# Altium PCB DIS_v2.1.PcbDoc
Units mm, origin at the board's own origin, x right, y up, seen from the top; angles counter-clockwise.
Board outline 51 x 45 mm, 2 copper layers (Top Layer, Bottom Layer); 40 components, 42 nets, 153 pads, 25 vias.
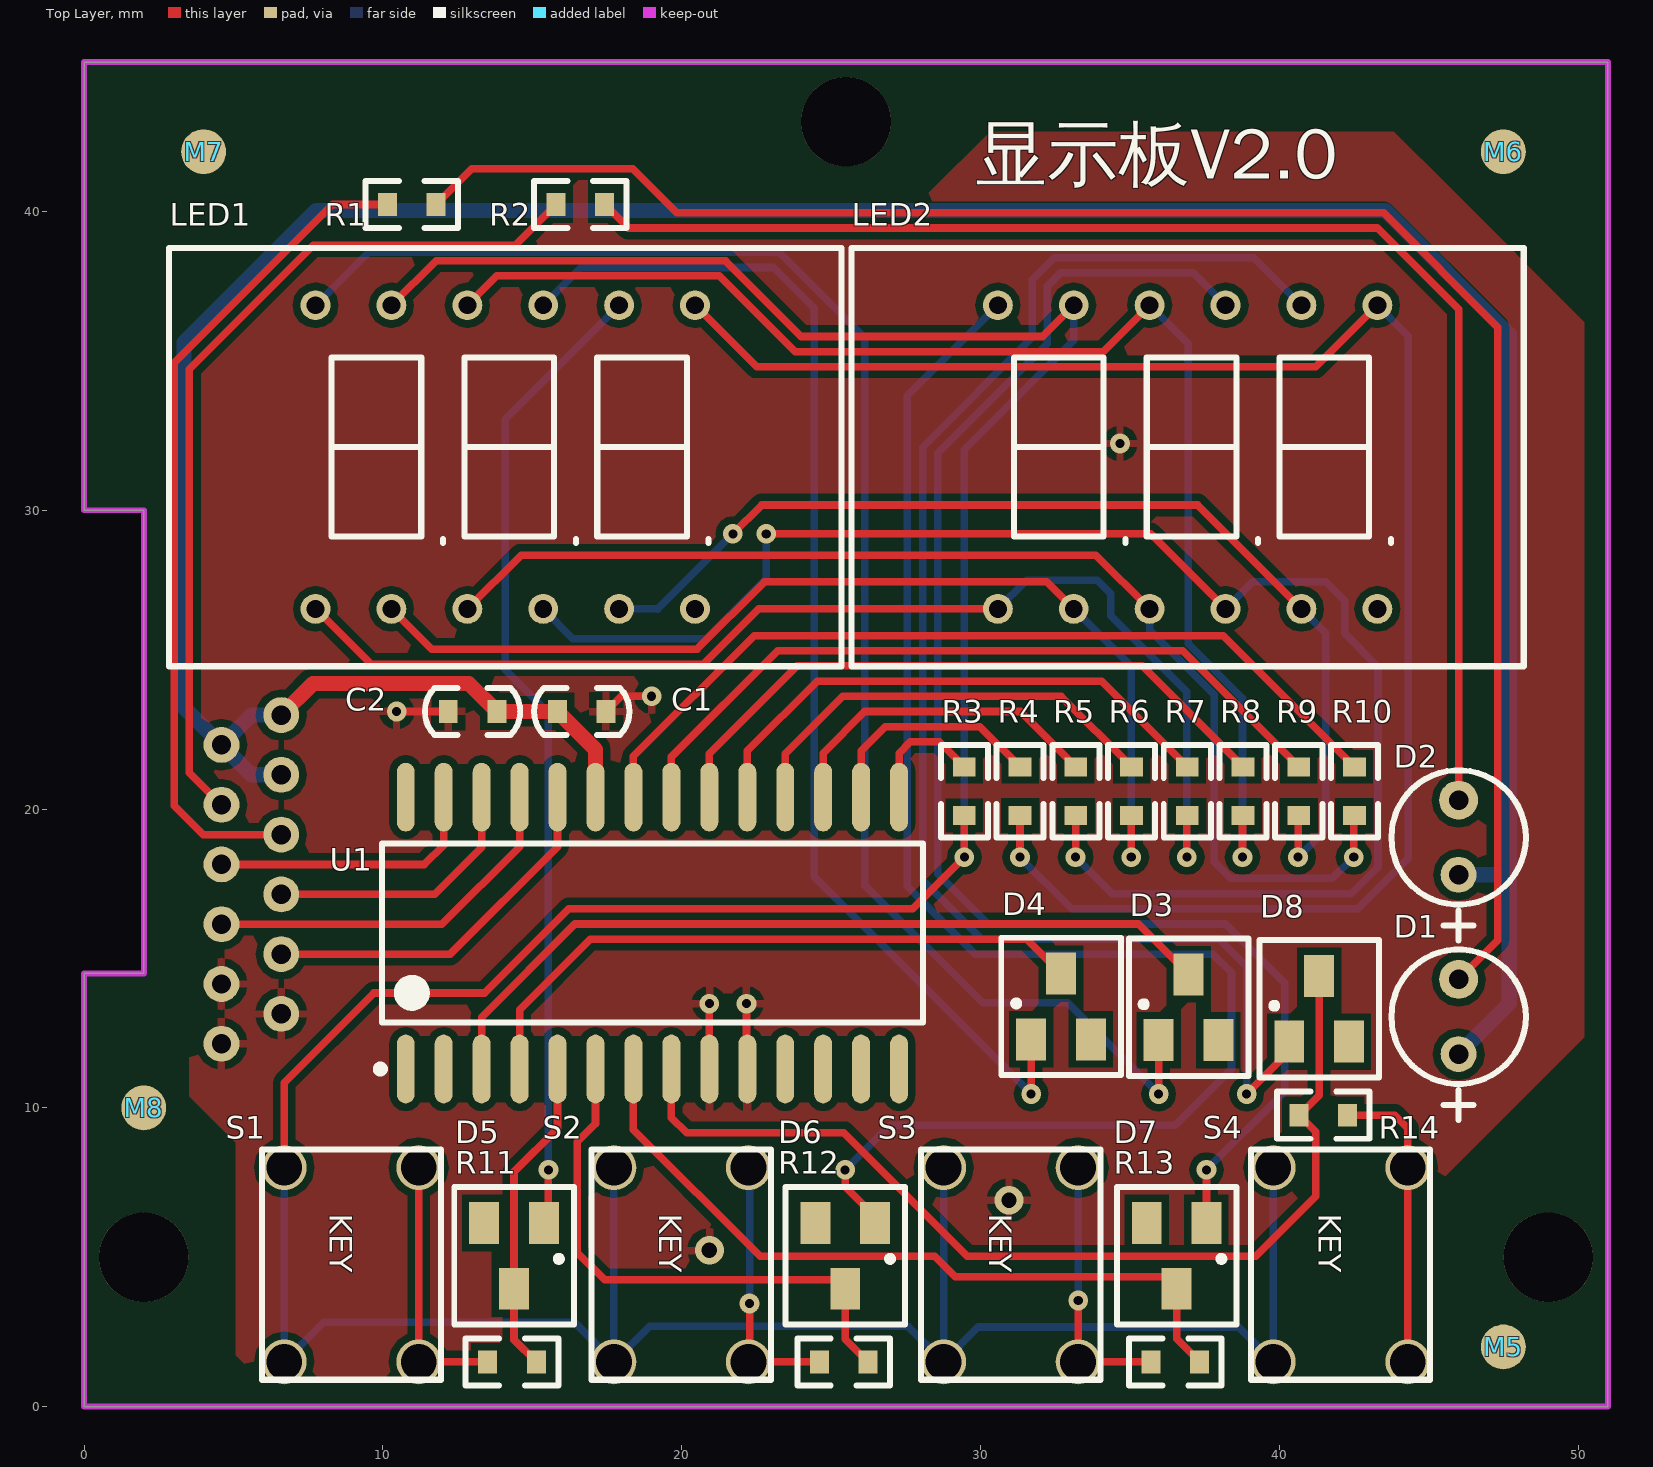
[diagram p0: Top Layer view]
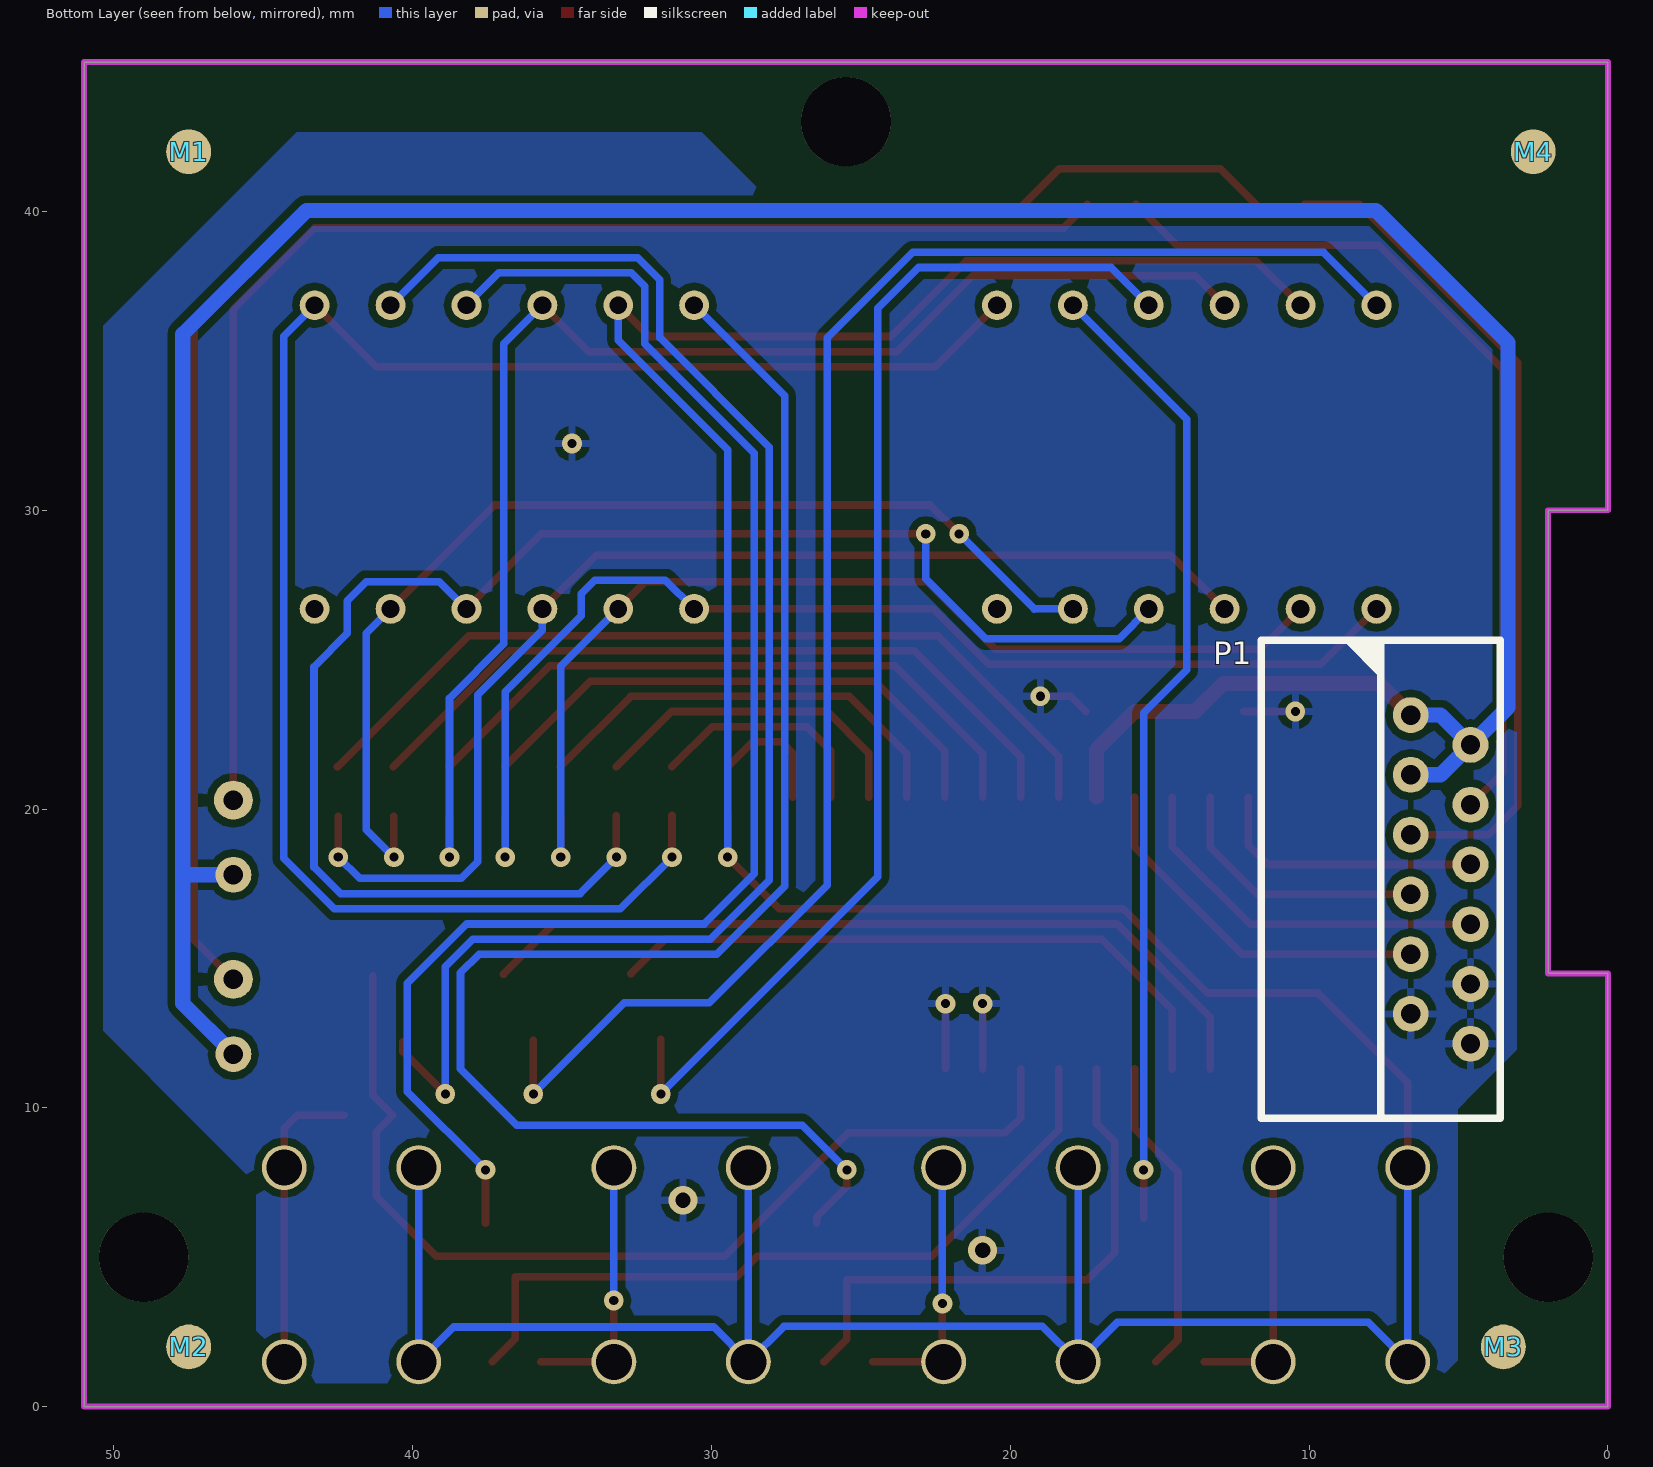
[diagram p1: Bottom Layer view, seen from below]

## Layer stack, top to bottom
Top Layer: signal copper 0.0356
Dielectric: dielectric 0.32, FR-4, Dk 4.8
Bottom Layer: signal copper 0.0356

## Board outline
0,0 51,0 51,45 0,45 0,30 2,30 2,14.5 0,14.5 0,0

## Design rules (kind name [scope] priority, off if disabled: settings)
Clearance [All] p1: gap=0.254
ComponentClearance [All] p1: gap=0 collisioncheckmode=3 verticalgap=0 showdistances=FALSE
HoleSize [All] p1: absolutevalues=TRUE maxlimit=25.4 minlimit=0.025 maxpercent=80.000 minpercent=20.000
MinimumSolderMaskSliver [All] p1 off: minsoldermaskwidth=0.254
PolygonConnect [All] p1: connectstyle=Relief reliefconductorwidth=0.254 reliefentries=4 polygonreliefangle="90 Angle"
RoutingVias [All] p1: holewidth=0.6 width=1 viastyle="Through Hole" minholewidth=0.254 minwidth=0.254 maxholewidth=25.4 maxwidth=25.4
SilkToSilkClearance [All] p1 off: silktosilkclearance=0.254
SilkscreenOverComponentPads [All] p1 off: minsilkscreentomaskgap=0.254
SolderMaskExpansion [All] p1: expansion=0.102
Width [All] p1: maxlimit=2.54 minlimit=0.254 preferedwidth=0.254
23 further rules are at their usual default settings.

## Components (designator, comment, footprint, x,y, rotation, side; value= is the part's Value field where it differs from the comment)
C1 "1uF" "C SMD 0603" 15.846,23.266 r0 top
C2 "1uF" "C SMD 0603" 13.814,23.266 r180 top
D1 "LED0" "LED DIP 3mm" 46,11.8 r90 top
D2 "LED0" "LED DIP 3mm" 46,17.8 r90 top
D3 "BAV99" SOT23 35.963,12.268 r0 top
D4 "BAV99" SOT23 31.696,12.294 r0 top
D5 "BAV99" SOT23 15.389,6.147 r180 top
D6 "BAV99" SOT23 26.476,6.147 r180 top
D7 "BAV99" SOT23 37.563,6.147 r180 top
D8 "BAV99" SOT23 40.332,12.217 r0 top
LED1 "数码管3361" 数码管3361 7.747,26.7 r0 top locked
LED2 "数码管3361" 数码管3361 30.582,26.7 r0 top locked
M1 "MARK点 TOP" "MARK点 TOP"#1 47.5,42 r180 bottom
M2 "MARK点 TOP" "MARK点 TOP"#1 47.5,2 r180 bottom
M3 "MARK点 TOP" "MARK点 TOP"#1 3.5,2 r180 bottom
M4 "MARK点 TOP" "MARK点 TOP"#1 2.5,42 r180 bottom
M5 "MARK点 TOP" "MARK点 TOP"#2 47.5,2 r0 top
M6 "MARK点 TOP" "MARK点 TOP"#2 47.5,42 r0 top
M7 "MARK点 TOP" "MARK点 TOP"#2 4,42 r0 top
M8 "MARK点 TOP" "MARK点 TOP"#2 2,10 r0 top
P1 "DISPLAY INTERFACE" FFC_1.0mm_12pin_弯 6.6,23.146 r270 bottom
R1 "510" "R SMD 0603" 11.782,40.234 r180 top
R2 "510" "R SMD 0603" 17.421,40.234 r180 top
R3 "510" "R SMD 0603" 29.461,19.787 r90 top
R4 "510" "R SMD 0603" 31.326,19.787 r90 top
R5 "510" "R SMD 0603" 33.191,19.787 r90 top
R6 "510" "R SMD 0603" 35.056,19.787 r90 top
R7 "510" "R SMD 0603" 36.921,19.787 r90 top
R8 "510" "R SMD 0603" 38.786,19.787 r90 top
R9 "510" "R SMD 0603" 40.651,19.787 r90 top
R10 "510" "R SMD 0603" 42.516,19.787 r90 top
R11 "2K" "R SMD 0603" 15.135,1.499 r180 top
R12 "2K" "R SMD 0603" 26.235,1.499 r180 top
R13 "2K" "R SMD 0603" 37.335,1.499 r180 top
R14 "2K" "R SMD 0603" 40.662,9.754 r0 top
S1 "SW-DPST" "按键 标准型 6*6mm" 6.7,1.5 r270 top
S2 "SW-DPST" "按键 标准型 6*6mm" 17.733,1.5 r270 top
S3 "SW-DPST" "按键 标准型 6*6mm" 28.767,1.5 r270 top
S4 "SW-DPST" "按键 标准型 6*6mm" 39.8,1.5 r270 top
U1 "CH452" SO28_N 19.021,15.85 r90 top

## Footprints (in the part's own frame and the unit in brackets; to place one, negate y for a bottom-side part, rotate by r counter-clockwise, add the part's x,y. Pads: shape width x height; smd on the part's side, far side on the other; paste and mask are expansions set on the pad)
"C SMD 0603" [mil]
  rect 25x30 smd: 1(0,0) 2(64,0)
  silkscreen extent -31,-31 95,31
FFC_1.0mm_12pin_弯 [mm]
  round 1.2 hole 0.65: 1(0,0) 2(1,2) 3(2,0) 4(3,2) 5(4,0) 6(5,2) 7(6,0) 8(7,2) 9(8,0) 10(9,2) 11(10,0) 12(11,2)
  silkscreen extent -2.5,-5 13.5,3
"LED DIP 3mm" [mm]
  round 1.2 hole 0.65: 1(0,0)
  round 1.3 hole 0.65: 2(2.5,0)
  silkscreen extent -2.2,-2.25 3.5,2.25
"MARK点 TOP"#1 [mm]
  round 3 on Bottom Solder: 1(0,0)
  round 1.5 smd: 1(0,0)
"MARK点 TOP"#2 [mm]
  round 1.5 smd: 1(0,0)
  round 3 on Top Solder: 1(0,0)
"R SMD 0603" [mil]
  rect 25x30 smd: 1(0,0) 2(64,0)
  silkscreen extent -29,-31 93,31
SO28_N [mm] "28-Pin Plastic Small Outline Integrated Circuit 1.27 mm Pitch, IPC Medium D"
  oval 2.3x0.6 smd: 1(-4.55,8.255) 2(-4.55,6.985) 3(-4.55,5.715) 4(-4.55,4.445) 5(-4.55,3.175) 6(-4.55,1.905) 7(-4.55,0.635) 8(-4.55,-0.635) 9(-4.55,-1.905) 10(-4.55,-3.175) 11(-4.55,-4.445) 12(-4.55,-5.715) 13(-4.55,-6.985) 14(-4.55,-8.255) 15(4.55,-8.255) 16(4.55,-6.985) 17(4.55,-5.715) 18(4.55,-4.445) 19(4.55,-3.175) 20(4.55,-1.905) 21(4.55,-0.635) 22(4.55,0.635) 23(4.55,1.905) 24(4.55,3.175) 25(4.55,4.445) 26(4.55,5.715) 27(4.55,6.985) 28(4.55,8.255)
  silkscreen extent -4.67,-9.05 3,9.23, body extent -3.8,-9.06 3.8,9.06, height 2.65
SOT23 [mm]
  rect 1x1.4 smd: 1(0,0) 2(2,0) 3(1,2.2)
  silkscreen extent -1,-1.2 3,3.4
"按键 标准型 6*6mm" [mm]
  round 1.5 hole 1.2: 1(0,0) 2(0,4.5) 3(-6.5,0) 4(-6.5,4.5)
  silkscreen extent -7.1,-0.75 0.6,5.25
数码管3361 [mm]
  round 1 hole 0.6: 1(0,0) 2(2.54,0) 3(5.08,0) 4(7.62,0) 5(10.16,0) 6(12.7,0) 7(12.7,10.16) 8(10.16,10.16) 9(7.62,10.16) 10(5.08,10.16) 11(2.54,10.16) 12(0,10.16)
  silkscreen extent -4.9,-1.92 17.6,12.08

## Part data
C1 C2: library part Cap, "Capacitor"
D1 D2: "Typical INFRARED GaAs LED"
LED1 LED2: library part 数码
M1 M2 M3 M4 M5 M6 M7 M8: library part "MARK点 TO"
P1: library part "Header 6X2", "Header, 6-Pin, Dual row"
R1 R2 R3 R4 R5 R6 R7 R8 R9 R10 R11 R12 R13 R14: library part Res2, "Resistor"
S1 S2 S3 S4: "Double-Pole, Single-Throw Switch"

## Free pads (board coordinates)
  round 3 hole 3: 0(2,5) 0(25.5,43) 0(49,5)

## Via types
v1: diameter 0.66, hole 0.305, Top Layer to Bottom Layer, 23 vias
v2: diameter 0.965, hole 0.508, Top Layer to Bottom Layer, 2 vias

## Nets (pads, with @x,y where several pads share a name; then routed paths per layer and width w, separated by ;. In a path a pad name is that pad's centre, name@x,y a point inside that pad or via, vN(x,y) a via of type N, cw(c..) or ccw(c..) an arc to the next point about the centre after c; other vN are vias at no path point)
DCLK: P1.6 U1.27 | length 9.3
  Top Layer w0.254: P1.6 11.386,18.146 12.036,18.796 U1.27
DIN: P1.7 U1.26 | length 9
  Top Layer w0.254: P1.7 11.733,17.146 13.306,18.72 U1.26
DOUT: P1.9 U1.24 | length 12.4
  Top Layer w0.254: P1.9 12.247,15.146 15.846,18.745 U1.24
GND: C1.2 C2.2 P1.10 P1.11 P1.12 U1.9 U1.10 | length 7.8
  Top Layer w0.254: v1(10.462,23.266) C2.2 ; C1.2 17.98,23.774 v1(18.996,23.774) ; U1.9 v1(20.926,13.487) ; U1.10@22.171,11.325 v1(22.171,13.487)
  other v1: 34.668,32.233
  other v2: 20.926,5.232 30.959,6.909
GRID1: D3.1 LED1.12 | length 53.2
  Top Layer w0.254: v1(35.963,10.465) D3.1
  Bottom Layer w0.254: LED1.12 9.52,38.633 23.27,38.633 26.133,35.77 26.133,17.45 30.07,13.513 32.915,13.513 v1(35.963,10.465)
GRID2: D4.1 LED1.9 | length 41.3
  Top Layer w0.254: v1(31.696,10.465) D4.1
  Bottom Layer w0.254: LED1.9 16.632,38.125 23.06,38.125 24.432,36.754 24.432,17.729 v1(31.696,10.465)
GRID3: D5.1 LED1.8 | length 32.7
  Top Layer w0.254: D5.1@15.542,6.299 v1(15.542,7.925)
  Bottom Layer w0.254: v1(15.542,7.925) 15.542,23.216 14.094,24.663 14.094,33.047 LED1.8
GRID4: D6.1 LED2.12 | length 52.5
  Top Layer w0.254: v1(25.473,7.925) 25.473,7.366 26.476,6.363 D6.1
  Bottom Layer w0.254: v1(25.473,7.925) 26.972,9.423 36.522,9.423 38.402,11.303 38.402,14.514 37.778,15.138 29.827,15.138 27.556,17.41 27.556,33.834 LED2.12
GRID5: D7.1 LED2.9 | length 50
  Top Layer w0.254: D7.1 v1(37.563,7.925)
  Bottom Layer w0.254: v1(37.563,7.925) 40.18,10.541 40.18,14.173 38.198,16.154 30.248,16.154 28.572,17.831 28.572,31.902 32.241,35.571 32.241,37.502 32.687,37.948 37.114,37.948 LED2.9
GRID6: D8.1 LED2.8 | length 50.2
  Top Layer w0.254: v1(38.91,10.465) 40.332,11.887 D8.1
  Bottom Layer w0.254: v1(38.91,10.465) 38.91,14.725 37.988,15.646 30.038,15.646 28.064,17.62 28.064,32.113 31.733,35.782 31.733,37.712 32.476,38.456 39.146,38.456 LED2.8
LED_POWER_2_KEY: P1.4 R2.2 | length 29.6
  Top Layer w0.254: P1.4 3.527,21.219 3.527,34.722 7.668,38.862 14.424,38.862 R2.2
LED_RUN_2_KEY: P1.5 R1.2 | length 28.1
  Top Layer w0.254: P1.5 3.99,19.146 3.019,20.117 3.019,34.932 8.321,40.234 R1.2
LOAD: P1.8 U1.25 | length 12.7
  Top Layer w0.254: P1.8 11.977,16.146 14.576,18.745 U1.25
NetD1_2: D1.2 R1.1 | length 60.6
  Top Layer w0.254: R1.1 12.976,41.427 18.361,41.427 19.834,39.954 43.489,39.954 47.317,36.126 47.317,15.617 D1.2
NetD2_2: D2.2 R2.1 | length 46.5
  Top Layer w0.254: R2.1 18.209,39.446 43.278,39.446 46,36.725 D2.2
NetD3_3: D3.3 U1.3 | length 27.4
  Top Layer w0.254: U1.3 13.306,13.03 16.431,16.154 35.277,16.154 D3.3
NetD4_3: D4.3 U1.4 | length 21.6
  Top Layer w0.254: U1.4 14.576,13.284 16.939,15.646 31.543,15.646 D4.3
NetD5_3: D5.3 R11.1 U1.5 | length 10.7
  Top Layer w0.254: R11.1 14.389,2.245 D5.3 14.389,7.865 15.846,9.322 U1.5
NetD6_3: D6.3 R12.1 U1.6 | length 18.8
  Top Layer w0.254: U1.6 17.116,9.474 16.507,8.865 16.507,5.156 17.421,4.242 25.476,4.242 25.476,2.257 R12.1
NetD7_3: D7.3 R13.1 U1.7 | length 25.4
  Top Layer w0.254: U1.7 18.386,9.271 22.628,5.029 28.47,5.029 29.156,4.343 36.563,4.343 36.563,2.27 R13.1
NetD8_3: D8.3 R14.1 U1.8 | length 33.8
  Top Layer w0.254: U1.8 19.656,9.677 20.164,9.169 25.422,9.169 29.562,5.029 39.214,5.029 41.221,7.036 41.221,9.195 R14.1 41.332,10.423 D8.3
NetR3_2: R3.2 U1.15 | length 4.2
  Top Layer w0.254: U1.15 27.276,21.869 27.657,22.25 28.623,22.25 R3.2
NetR4_2: R4.2 U1.16 | length 7.8
  Top Layer w0.254: U1.16 26.006,21.946 26.819,22.758 29.98,22.758 R4.2
NetR5_2: R5.2 U1.17 | length 11.3
  Top Layer w0.254: U1.17 24.736,21.869 26.133,23.266 31.337,23.266 R5.2
NetR6_2: R6.2 U1.18 | length 14.8
  Top Layer w0.254: U1.18 23.466,21.844 25.397,23.774 32.694,23.774 R6.2
NetR7_2: R7.2 U1.19 | length 18.4
  Top Layer w0.254: U1.19 22.196,21.946 24.533,24.282 34.051,24.282 R7.2
NetR8_2: R8.2 U1.20 | length 21.9
  Top Layer w0.254: U1.20 20.926,21.844 23.873,24.79 35.408,24.79 R8.2
NetR9_2: R9.2 U1.21 | length 25.4
  Top Layer w0.254: U1.21 19.656,21.742 23.212,25.298 36.765,25.298 R9.2
NetR10_2: R10.2 U1.22 | length 29
  Top Layer w0.254: U1.22 18.386,21.768 22.425,25.806 38.122,25.806 R10.2
NetR11_2: R11.2 S1.2 S1.4 | length 8.8
  Top Layer w0.254: S1.4@11.201,7.999 11.201,1.499 R11.2
NetR12_2: R12.2 S2.2 S2.4 | length 8.8
  Top Layer w0.254: S2.2@22.235,1.499 R12.2 ; S2.2@22.273,1.539 v1(22.273,3.454)
  Bottom Layer w0.254: v1(22.273,3.454) S2.4@22.273,7.961
NetR13_2: R13.2 S3.2 S3.4 | length 8.9
  Top Layer w0.254: S3.2@33.268,1.499 R13.2 ; S3.2@33.271,1.504 v1(33.271,3.556)
  Bottom Layer w0.254: v1@33.267,3.56 S3.4
NetR14_2: R14.2 S4.2 S4.4 | length 10
  Top Layer w0.254: R14.2 43.863,9.754 44.3,9.316 S4.4 S4.2
SEG0: LED1.11 LED2.11 R3.1 S1.1 S1.3 S2.1 S2.3 S3.1 S3.3 S4.1 S4.3 | length 137.2
  Top Layer w0.254: S1.3 6.7,10.843 9.7,13.843 13.401,13.843 16.22,16.662 27.734,16.662 v1(29.461,18.39) R3.1 ; LED1.11 11.781,38.354 21.467,38.354 24.007,35.814 32.076,35.814 LED2.11
  Bottom Layer w0.254: S1.3 S1.1 8.019,2.819 16.414,2.819 S2.1 ; S2.3 S2.1 ; S3.3 S3.1 ; v1(29.461,18.39) 29.461,32.029 33.122,35.69 LED2.11 ; S4.3 S4.1 38.633,2.667 29.934,2.667 S3.1 ; S2.1 18.926,2.692 27.574,2.692 S3.1
SEG1: LED1.7 LED2.7 R4.1 | length 59.3
  Top Layer w0.254: LED1.7 22.509,34.798 41.22,34.798 LED2.7 ; v1(31.322,18.39) R4.1@31.322,19.783
  Bottom Layer w0.254: v1(31.322,18.39) 33.049,16.662 42.625,16.662 44.32,18.357 44.32,35.822 LED2.7
SEG2: LED1.4 LED2.4 R5.1 | length 53
  Top Layer w0.254: v1(22.831,29.21) 35.692,29.21 LED2.4 ; v1(33.184,18.39) R5.1@33.184,19.779
  Bottom Layer w0.254: LED1.4 16.362,25.705 20.825,25.705 22.831,27.711 v1(22.831,29.21) ; v1(33.184,18.39) 34.403,17.17 42.415,17.17 43.304,18.059 43.304,24.765 42.186,25.883 42.186,26.975 41.551,27.61 39.111,27.61 LED2.4
SEG3: LED1.2 LED2.2 R6.1 | length 35.2
  Top Layer w0.254: LED1.2 11.638,25.349 20.513,25.349 22.773,27.61 32.212,27.61 LED2.2 ; v1(35.045,18.39) R6.1@35.045,19.776
  Bottom Layer w0.254: LED2.2 35.045,24.776 v1(35.045,18.39)
SEG4: LED1.1 LED2.1 R7.1 | length 40
  Top Layer w0.254: LED1.1 9.606,24.841 20.723,24.841 22.582,26.7 LED2.1 ; v1(36.907,18.39) R7.1@36.907,19.772
  Bottom Layer w0.254: LED2.1 31.542,27.661 33.906,27.661 34.363,27.203 34.363,26.467 36.907,23.923 v1(36.907,18.39)
SEG5: LED1.10 LED2.10 R8.1 | length 46.1
  Top Layer w0.254: LED1.10 13.813,37.846 21.257,37.846 23.797,35.306 34.108,35.306 LED2.10 ; v1(38.768,18.39) R8.1@38.768,19.768
  Bottom Layer w0.254: LED2.10 36.954,35.568 36.954,25.527 38.768,23.713 v1(38.768,18.39)
SEG6: LED1.5 LED2.5 R9.1 | length 36.1
  Top Layer w0.254: v1(21.714,29.21) 22.679,30.175 37.266,30.175 LED2.5 ; v1(40.63,18.39) R9.1@40.63,19.765
  Bottom Layer w0.254: LED1.5 19.195,26.7 ; 19.199,26.695 19.199,26.698 v1@21.711,29.21 ; v1(40.63,18.39) 41.551,19.311 41.551,25.89 LED2.5
SEG7: LED1.3 LED2.3 R10.1 | length 40.3
  Top Layer w0.254: LED1.3 14.626,28.499 33.863,28.499 LED2.3 ; v1(42.491,18.39) R10.1@42.491,19.761
  Bottom Layer w0.254: LED2.3 35.662,25.981 37.817,23.825 37.817,18.237 38.376,17.678 41.78,17.678 v1(42.491,18.39)
VCC: C1.1 C2.1 D1.1 D2.1 P1.1 P1.2 P1.3 U1.23 | length 106.6
  Top Layer w0.508: P1.1 7.66,24.206 12.875,24.206 C2.1 C1.1 17.116,21.996 U1.23
  Bottom Layer w0.508: P1.3 5.6,21.146 P1.2 ; P1.1 5.6,23.146 P1.2 ; D1.1 47.698,13.498 47.698,35.89 43.558,40.03 7.769,40.03 3.35,35.611 3.35,23.396 P1.2 ; D2.1 47.667,17.8
pads on no net: D3.2 D4.2 D5.2 D6.2 D7.2 D8.2 LED1.6 LED2.6 M1.1 M2.1 M3.1 M4.1 M5.1 M6.1 M7.1 M8.1 U1.1 U1.2 U1.11 U1.12 U1.13 U1.14 U1.28

## Polygon pours and split planes (outlines as drawn)
GND on Bottom Layer "Top Layer-No Net" (solid, remove dead copper, pour order 2): 1.826,36.017 1.826,31.191 2.689,30.328 3.045,29.972 3.045,27.864 3.045,11.938 4.467,10.516 5.026,9.957 5.026,8.077 5.026,1.549 5.788,0.787 43.482,0.787 45.158,2.464 45.234,2.54 45.234,5.461 45.234,7.442 47.165,9.373 50.365,12.573 50.365,33.655 50.365,36.17 43.888,42.647 30.324,42.647 29.562,41.885 27.708,40.03 23.67,40.03 23.441,40.03 21.231,42.24 20.799,42.672 8.607,42.672 8.48,42.672 1.826,36.017
GND on Top Layer "Top Layer-No Net" (solid, remove dead copper, pour order 4): 8.353,41.961 1.622,35.23 1.622,33.604 1.622,31.826 3.527,29.921 3.527,10.389 4.95,8.966 5.077,8.839 5.077,2.337 5.077,1.727 5.864,0.94 43.659,0.94 45.183,2.464 45.336,2.616 45.336,6.985 45.336,7.493 46.707,8.865 50.213,12.37 50.213,27.559 50.213,36.297 45.666,40.843 43.837,42.672 30.324,42.672 27.937,40.284 22.577,40.284 21.892,40.284 18.92,43.256 9.649,43.256 8.353,41.961

## Keep-outs
Keep-Out Layer:
  the board outline again, w0.2

## Silkscreen, mask and mechanical layers (free items; w line width, h text height)
Top Overlay:
  text "显示板V2.0" at 29.842,40.513 h3

## Text inside footprints (layer, text, board x,y; h text height)
S1: Top Overlay "KEY" at 8.224,6.453 h0.76 r270
S2: Top Overlay "KEY" at 19.257,6.453 h0.76 r270
S3: Top Overlay "KEY" at 30.291,6.453 h0.76 r270
S4: Top Overlay "KEY" at 41.324,6.453 h0.76 r270